# EAGLE board mubi-ESP32-38 (EAGLE 7.2.0)
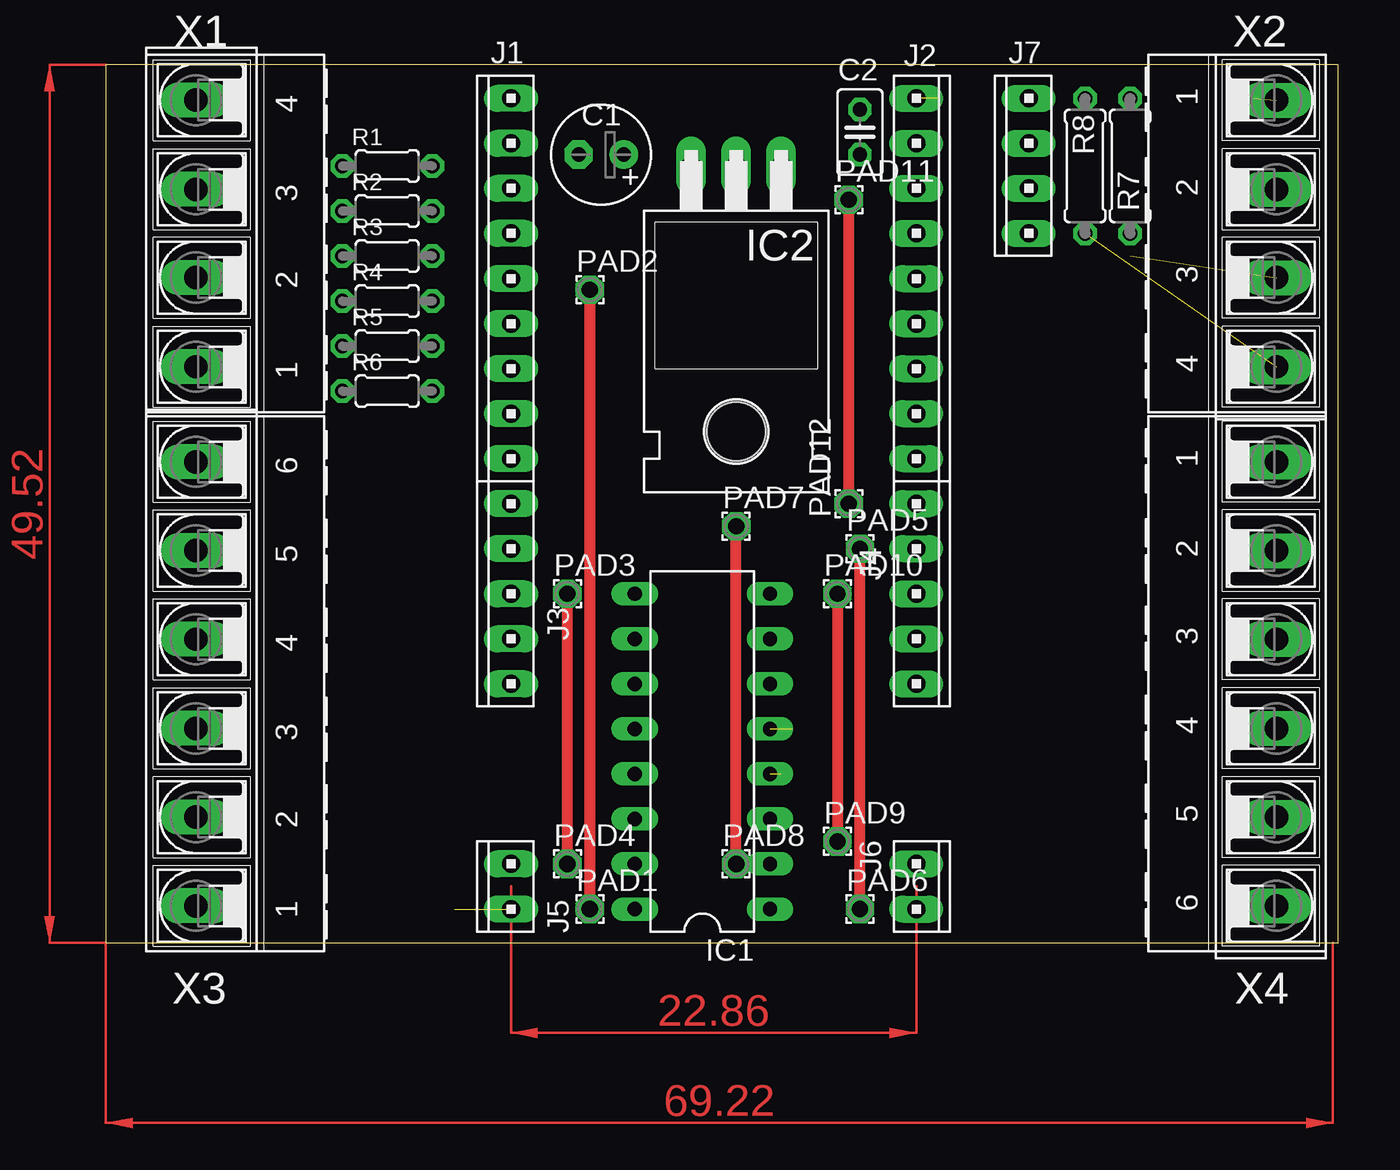
[diagram p0: board, top side]
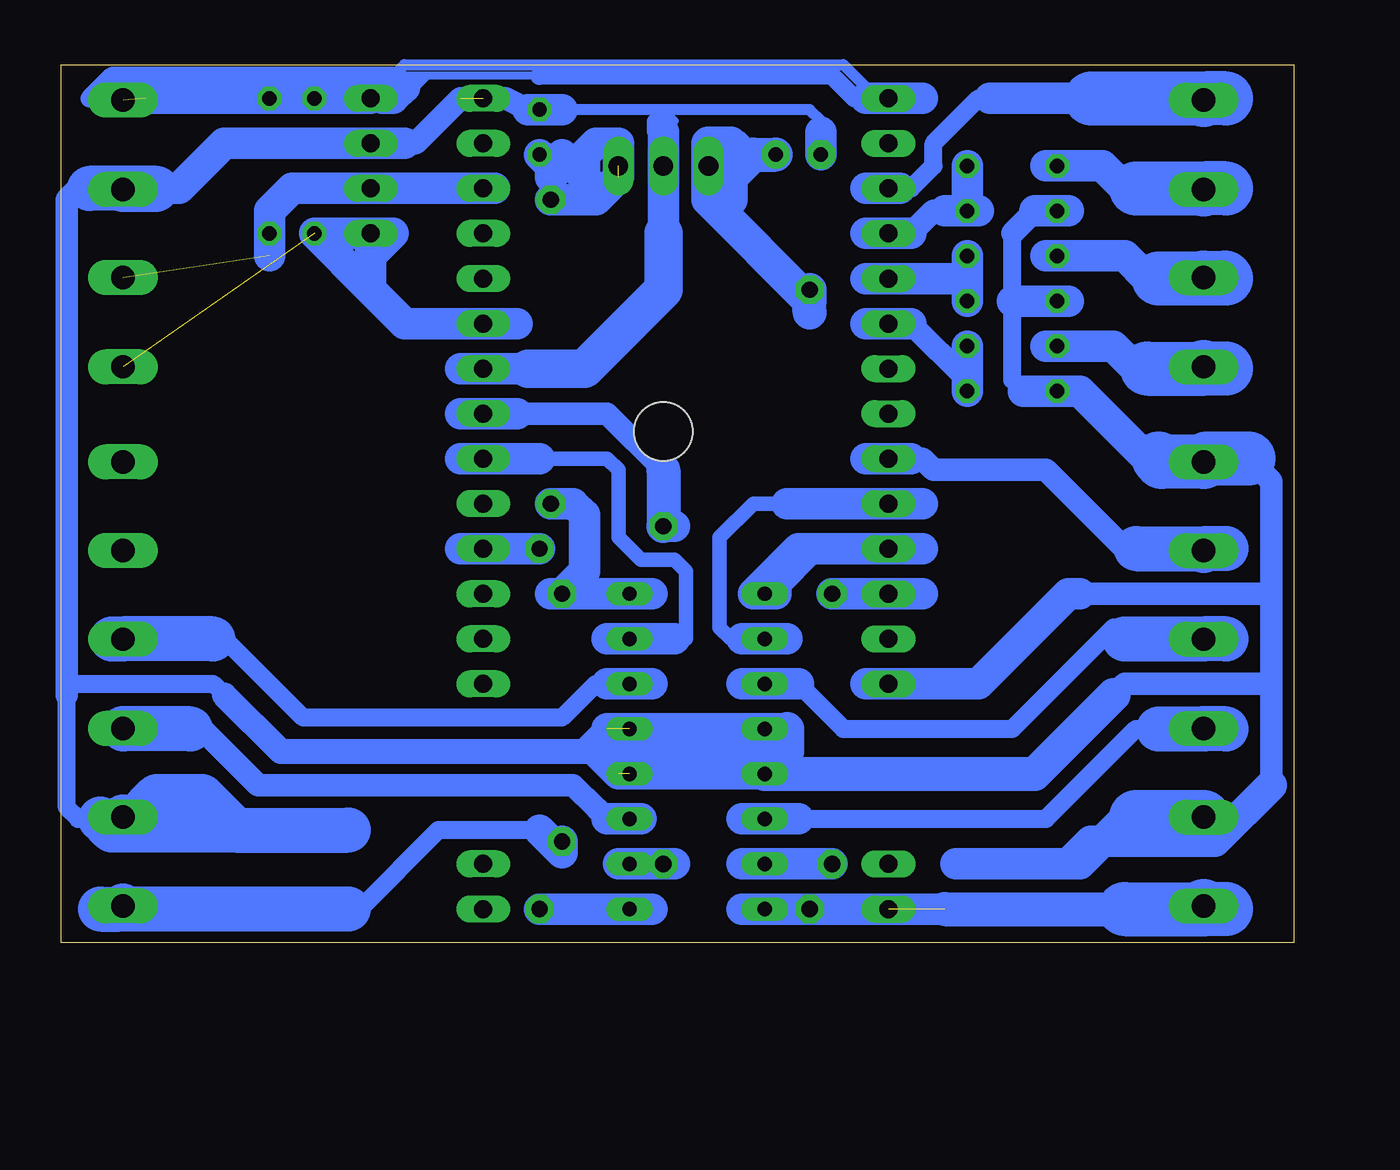
[diagram p1: board, bottom side, seen from below]

Size 69.52 x 49.52 mm. Coordinates in mm from the lower left corner, seen from the top.
Outline: 0,0 69.52,0 69.52,49.52 0,49.52 0,0
Copper layers (1*16): Top 0.035mm / dielectric 1.5mm / Bottom 0.035mm
Design rules "default": minimum track width 10mil, minimum drill 24mil, track to track 8mil, track to pad 8mil, pad to pad 8mil, via to via 8mil, smd to smd 8mil, copper to edge 40mil, drill to drill 8mil, minimum pad ring 10mil, minimum via ring 8mil, stop-mask expansion 4mil, vias tented up to drill 0mil, thermal gap 10mil

## Footprints (pad centres in the part's own frame; a part is rotated, then mirrored left to right if it is on the bottom)
E2,5-6 = drill 0.813 pad 1.6: + -1.27,0 | drill 0.813 pad 1.6 octagon: - 1.27,0
C025-025X050 = drill 0.813 octagon: 1 -1.27,0; 2 1.27,0
DIL16 = drill 0.813 long: 1 -8.89,-3.81; 2 -6.35,-3.81; 3 -3.81,-3.81; 4 -1.27,-3.81; 5 1.27,-3.81; 6 3.81,-3.81; 7 6.35,-3.81; 8 8.89,-3.81; 9 8.89,3.81; 10 6.35,3.81; 11 3.81,3.81; 12 1.27,3.81; 13 -1.27,3.81; 14 -3.81,3.81; 15 -6.35,3.81; 16 -8.89,3.81
TO220H = drill 1.118 long: 1 -2.54,-10.16; 2 0,-10.16; 3 2.54,-10.16 | hole 3.302: 0,4.826
10X09MTA = drill 1.016 long: 1 10.16,0; 2 7.62,0; 3 5.08,0; 4 2.54,0; 5 0,0; 6 -2.54,0; 7 -5.08,0; 8 -7.62,0; 9 -10.16,0
10X05MTA = drill 1.016 long: 1 5.08,0; 2 2.54,0; 3 0,0; 4 -2.54,0; 5 -5.08,0
10X02MTA = drill 1.016 long: 1 1.27,0; 2 -1.27,0
10X04MTA = drill 1.016 long: 1 3.81,0; 2 1.27,0; 3 -1.27,0; 4 -3.81,0
1,6/0,9 = drill 0.914 pad 1.6 octagon: 1 0,0
0204/5 = drill 0.813 octagon: 1 -2.54,0; 2 2.54,0
0207/7 = drill 0.813 octagon: 1 -3.81,0; 2 3.81,0
AK500/4-H = drill 1.321 long: 1 -7.518,0; 2 -2.489,0; 3 2.489,0; 4 7.518,0
AK500/6-H = drill 1.321 long: 1 -12.522,0; 2 -7.518,0; 3 -2.515,0; 4 2.515,0; 5 7.518,0; 6 12.522,0

## Placement (x,y rotation side)
C1  [E2,5-6]  27.94,44.45 180 top
C2  [C025-025X050]  42.55,45.72 90 top
IC1  L293D  [DIL16]  33.66,10.8 90 top
IC2  7805T  [TO220H]  35.56,33.66 180 top
J1  [10X09MTA]  22.86,37.47 90 top
J2  [10X09MTA]  45.72,37.47 270 top
J3  [10X05MTA]  22.86,19.69 90 top
J4  [10X05MTA]  45.72,19.69 270 top
J5  [10X02MTA]  22.86,3.17 90 top
J6  [10X02MTA]  45.72,3.17 270 top
J7  [10X04MTA]  52.07,43.81 90 top
PAD1  WIREPAD1,6/0,9  [1,6/0,9]  27.3,1.91 0 top
PAD2  WIREPAD1,6/0,9  [1,6/0,9]  27.3,36.83 0 top
PAD3  WIREPAD1,6/0,9  [1,6/0,9]  26.04,19.69 0 top
PAD4  WIREPAD1,6/0,9  [1,6/0,9]  26.04,4.44 0 top
PAD5  WIREPAD1,6/0,9  [1,6/0,9]  42.55,22.23 0 top
PAD6  WIREPAD1,6/0,9  [1,6/0,9]  42.55,1.91 0 top
PAD7  WIREPAD1,6/0,9  [1,6/0,9]  35.56,23.5 0 top
PAD8  WIREPAD1,6/0,9  [1,6/0,9]  35.56,4.44 0 top
PAD9  WIREPAD1,6/0,9  [1,6/0,9]  41.27,5.71 0 top
PAD10  WIREPAD1,6/0,9  [1,6/0,9]  41.27,19.69 0 top
PAD11  WIREPAD1,6/0,9  [1,6/0,9]  41.91,41.91 0 top
PAD12  WIREPAD1,6/0,9  [1,6/0,9]  41.91,24.77 90 top
R1  [0204/5]  15.88,43.81 0 top
R2  [0204/5]  15.88,41.27 0 top
R3  [0204/5]  15.88,38.73 0 top
R4  [0204/5]  15.88,36.2 0 top
R5  [0204/5]  15.88,33.66 0 top
R6  [0204/5]  15.88,31.12 0 top
R7  [0207/7]  57.78,43.81 90 top
R8  [0207/7]  55.24,43.81 90 top
X1  [AK500/4-H]  5.08,40.01 90 top
X2  [AK500/4-H]  66.04,40.01 270 top
X3  [AK500/6-H]  5.08,14.61 90 top
X4  [AK500/6-H]  66.04,14.61 270 top

## Library data of the parts
C1 R1-R8 = resistor
C2 = rcl
IC1 = st-microelectronics; MPN: L293D; OC_FARNELL: 9589619; OC_NEWARK: 56P8249
IC2 = linear
J1-J7 = con-amp
PAD1-PAD12 = wirepad
X1 X2 = con-ptr500; OC_FARNELL: unknown; OC_NEWARK: unknown
X3 X4 = con-ptr500

## Nets
+3.3V: J1.1 J7.1 R7.2 R8.2 X2.1
+5V: C1.+ IC1.16 IC2.3 J5.2 PAD1.1 PAD2.1 X3.1
+VBAT: C2.1 IC1.8 IC2.1 PAD9.1 PAD10.1 PAD11.1 PAD12.1 X4.6
AUX2: J1.9 X3.5
CM11: IC1.2 J2.2 PAD7.1 PAD8.1
CM12: IC1.7 J2.1
CM21: IC1.15 J3.3 PAD3.1 PAD4.1
CM22: IC1.10 J3.1
ENAM1: IC1.1 J4.4 PAD5.1 PAD6.1
ENAM2: IC1.9 J3.2
GND: C1.- C2.2 IC1.4 IC1.5 IC1.12 IC1.13 IC2.2 J2.3 J2.9 J3.5 J7.2 R2.1 R4.1 R6.1 X2.2 X3.2 X3.6 X4.5
M11: IC1.3 X4.4
M12: IC1.6 X4.3
M21: IC1.14 X3.3
M22: IC1.11 X3.4
N$1: R1.1 X1.3
N$2: R3.1 X1.2
N$3: R5.1 X1.1
N$4: J1.3 X1.4
SCL: J2.7 J7.3 R7.1 X2.3
SDA: J2.4 J7.4 R8.1 X2.4
USON1: J1.4 R1.2 R2.2
USON2: J1.5 R3.2 R4.2
USON3: J1.6 R5.2 R6.2

## Tracks (layer width: path | path; a pad name or v marks a point on that pad's centre or on a via)
+3.3V  (1 unrouted)
  Bottom 0.457: 42.55,48.9 48.9,48.9 | 48.9,48.9 50.8,48.9 | 50.16,48.26 49.53,48.26 48.9,48.9
  Bottom 0.61: J7.1 50.16,49.53 25.4,49.53 23.5,47.62
  Bottom 1.016: 24.13,47.62 24.77,47.62 26.04,48.9 42.55,48.9 | 50.8,48.9 66.67,48.9 67.94,47.62 J7.1 51.44,47.62
  Bottom 1.778: J7.1 R8.2 R7.2 64.77,47.62 | 20.95,47.62 J1.1 23.5,47.62 24.13,47.62 | 51.44,47.62 50.8,47.62 50.16,48.26
+5V  (1 unrouted)
  Top 0.61: PAD1.1 PAD2.1
  Bottom 1.778: 31.11,1.91 IC1.16 PAD1.1 19.68,1.91
  Bottom 1.93: 19.68,1.91 9.53,1.91 | PAD2.1 27.3,36.2 | 27.3,35.56 27.3,36.2 | 27.3,36.2 33.02,41.91 IC2.3 | IC2.3 33.02,45.09 31.75,45.09 31.11,44.45 30.48,44.45 | 30.48,44.45 C1.+ | IC2.3 33.02,43.18 31.75,41.91 31.75,43.18 30.48,44.45
  Bottom 3.048: 9.53,1.91 4.9,1.91 | 3.81,1.91 4.9,1.91 | 4.9,1.91 X3.1
+VBAT  (1 unrouted)
  Top 0.61: PAD10.1 PAD9.1 | PAD12.1 PAD11.1
  Bottom 1.016: 42.55,6.35 48.26,6.35 52.7,1.91 53.34,1.91
  Bottom 1.778: PAD9.1 41.27,5.08 42.55,6.35 | 36.2,19.69 IC1.8 PAD10.1 | PAD10.1 41.91,19.69 | PAD12.1 40.64,24.77 40.01,24.13 40.01,20.96 PAD10.1 | PAD11.1 39.37,41.91 38.1,43.18 38.1,45.09 39.37,45.09 40.01,44.45 40.01,43.18 | 40.01,43.18 39.37,42.55 | 40.01,43.18 41.27,44.45 41.27,43.81 41.91,43.18 41.91,43.81 C2.1
  Bottom 2.54: 53.34,1.91 66.22,1.91 | 67.31,1.91 66.22,1.91 | 66.22,1.91 X4.6
AUX2
  Bottom 1.27: 21.59,27.3 20.95,27.3 20.32,26.67 13.97,26.67 9.53,22.23 8.89,22.23
  Bottom 1.778: 24.13,27.3 J1.9 21.59,27.3
  Bottom 2.54: 8.89,22.23 4.98,22.23 | 3.81,22.23 4.98,22.23 | 4.98,22.23 X3.5
CM11
  Top 0.61: PAD8.1 PAD7.1
  Bottom 1.27: 43.81,29.84 38.73,29.84 35.56,26.67
  Bottom 1.778: 46.99,29.84 J2.2 43.81,29.84 | 34.92,23.5 PAD7.1 | 38.1,4.44 IC1.2 PAD8.1 34.92,4.44
  Bottom 1.93: 35.56,26.67 PAD7.1
CM12
  Bottom 0.813: 34.92,17.14 34.29,17.14 34.29,20.96 34.92,21.59 36.83,21.59 38.1,22.86 38.1,26.67 38.73,27.3 42.55,27.3
  Bottom 1.778: 38.73,17.14 IC1.7 34.92,17.14 | 46.99,27.3 J2.1 42.55,27.3
CM21
  Top 0.61: PAD4.1 PAD3.1
  Bottom 1.778: 31.11,4.44 IC1.15 PAD4.1 | 20.95,19.69 J3.3 PAD3.1
CM22
  Bottom 0.813: 31.11,17.14 31.75,17.14 32.38,17.78 32.38,22.86 30.48,24.77 28.57,24.77
  Bottom 1.778: 28.57,17.14 IC1.10 31.11,17.14 | 28.57,24.77 J3.1 20.95,24.77
ENAM1
  Top 0.61: PAD6.1 PAD5.1
  Bottom 1.778: PAD5.1 J4.4 46.99,22.23 | PAD6.1 IC1.1 36.2,1.91
ENAM2
  Bottom 1.778: 20.95,22.23 J3.2 27.3,22.23 | 27.3,22.23 27.94,22.23 30.48,19.69 IC1.9 | IC1.9 29.21,19.69 29.21,20.32 | 29.21,20.32 27.3,22.23 | 29.21,20.32 IC1.9
GND  (3 unrouted)
  Bottom 0.457: 35.56,45.72 34.92,46.36 35.56,46.99
  Bottom 0.61: 35.56,46.99 41.27,46.99 | 26.67,45.72 26.67,46.36 27.3,46.99 35.56,46.99 | 35.56,46.99 36.2,46.36 36.2,45.72 35.56,45.72
  Bottom 1.016: 67.31,6.99 68.58,6.99 69.22,7.62 69.22,14.61 60.96,14.61 60.33,13.97 | 15.24,31.12 15.88,31.75 15.88,36.2 15.88,40.01
  Bottom 1.27: 43.18,46.99 44.45,47.62 46.99,47.62 49.53,45.09 50.16,45.09 | 15.88,40.01 14.61,41.27 | 1.27,8.89 1.27,14.61 | 1.27,14.61 1.27,19.69 | 1.27,19.69 1.27,26.04 2.54,27.3 | 12.06,19.69 1.27,19.69 | 10.16,13.97 9.53,14.61 1.27,14.61 | 67.94,42.55 68.58,42.55 69.22,41.91 69.22,14.61 69.22,13.97
  Bottom 1.422: 60.33,13.97 57.15,10.8 40.01,10.8 38.73,12.07
  Bottom 1.778: 38.73,12.07 IC1.12 | IC1.12 28.57,12.07 28.57,9.53 IC1.13 38.1,9.53 39.37,10.8 29.21,10.8 29.21,11.43 IC1.12 | IC2.2 35.56,42.55 | IC2.2 35.56,45.72 | 41.27,46.99 C2.2 43.18,46.99 | 50.16,45.09 J7.2 60.33,45.09 62.87,42.55 64.14,42.55 | C1.- 26.67,45.72 | 15.24,31.12 R6.1 12.06,31.12 8.26,27.3 7.62,27.3 | 14.61,41.27 R2.1 12.7,41.27 | 12.7,36.2 R4.1 15.88,36.2 | 46.99,32.38 J2.3 43.18,32.38 | 35.56,40.01 IC2.2 | 8.89,6.99 9.53,6.99 12.06,4.44 12.7,4.44 | 19.05,4.44 12.7,4.44 | 12.7,4.44 11.43,5.71 4.45,5.71 1.27,8.89 | 24.13,14.61 J3.5 17.78,14.61 12.7,19.69 12.06,19.69
  Bottom 1.93: 28.57,12.07 28.57,10.8 IC1.13 14.61,9.53 10.16,13.97
  Bottom 2.184: 43.18,32.38 40.01,32.38 35.56,36.83 35.56,40.01
  Bottom 2.54: X4.5 65.3,7.09 64.14,8.25 61.59,8.25 59.69,6.35 | 59.69,6.35 53.34,6.35 | 59.69,6.35 66.67,6.35 67.31,6.99 | X2.2 64.19,42.49 64.14,42.55 67.94,42.55
  Bottom 3.048: X3.2 8.89,7.09 8.89,6.99 | 2.54,27.3 4.9,27.3 X3.6 7.44,27.13 7.62,27.3
M11
  Bottom 1.27: 38.73,6.99 39.37,7.62 40.64,8.89 58.42,8.89 61.59,12.07 62.23,12.07
  Bottom 1.778: 36.83,6.99 IC1.3 38.73,6.99
  Bottom 2.54: 62.23,12.07 66.02,12.07 X4.4
M12
  Bottom 1.016: 38.73,14.61 39.37,14.61 41.27,12.7 55.88,12.7 60.33,17.14 60.96,17.14
  Bottom 1.778: 36.2,14.61 IC1.6 38.73,14.61
  Bottom 2.54: 60.96,17.14 66.06,17.14 | 66.67,17.14 66.06,17.14 | 66.06,17.14 X4.3
M21
  Bottom 1.016: 27.94,6.99 13.97,6.99 8.89,12.07 7.62,12.07
  Bottom 1.778: 31.11,6.99 IC1.14 27.94,6.99
  Bottom 2.54: 7.62,12.07 5.05,12.07 | 3.81,12.07 5.05,12.07 | 5.05,12.07 X3.3
M22
  Bottom 1.016: 27.94,14.61 25.4,12.07 15.88,12.07 10.16,17.78 10.16,17.14 9.53,17.14
  Bottom 1.778: 31.11,14.61 IC1.11 27.94,14.61
  Bottom 2.54: 9.53,17.14 5.71,17.14 5.11,17.14 | 3.81,17.14 5.11,17.14 | 5.11,17.14 X3.4
N$1
  Bottom 1.778: 13.97,43.81 R1.1 10.79,43.81 9.53,42.55 8.89,42.55
  Bottom 3.048: 8.89,42.55 5.03,42.55 | 3.81,42.55 5.03,42.55 | 5.03,42.55 X1.3
N$2
  Bottom 1.778: 7.62,37.47 8.26,37.47 9.53,38.73 R3.1 13.97,38.73
  Bottom 3.048: X1.2 3.86,37.52 3.81,37.47 7.62,37.47
N$3
  Bottom 1.778: 13.97,33.66 R5.1 10.16,33.66 8.89,32.38 8.26,32.38
  Bottom 3.048: 8.26,32.38 4.98,32.38 | 3.81,32.38 4.98,32.38 | 4.98,32.38 X1.1
N$4
  Bottom 1.016: 22.23,42.55 21.59,42.55 20.32,43.81 20.32,45.09 17.78,47.62 17.14,47.62
  Bottom 1.778: 24.13,42.55 J1.3 22.23,42.55 | 17.14,47.62 11.43,47.62
  Bottom 3.048: 11.43,47.62 4.98,47.62 | 3.81,47.62 4.98,47.62 | 4.98,47.62 X1.4
SCL  (1 unrouted)
  Bottom 1.778: 45.09,42.55 J2.7 J7.3 55.88,42.55 56.52,42.55 57.78,41.27 R7.1 57.78,38.73
SDA  (1 unrouted)
  Bottom 1.778: 43.81,34.92 J2.4 50.16,34.92 52.07,36.83 | 52.07,36.83 R8.1 J7.4 | J7.4 50.8,40.01 52.07,38.73 | 52.07,38.73 52.07,36.83 | 52.07,38.73 J7.4
USON1
  Bottom 1.27: 21.59,40.01 20.32,41.27 19.68,41.27
  Bottom 1.778: 24.13,40.01 J1.4 21.59,40.01 | 19.68,41.27 R2.2 | 17.78,41.27 R2.2 | R1.2 R2.2
USON2
  Bottom 1.778: 24.13,37.47 J1.5 18.41,37.47 | 18.41,37.47 R3.2 | R4.2 18.41,37.47
USON3
  Bottom 1.27: 21.59,34.92 18.41,31.75
  Bottom 1.778: 24.13,34.92 J1.6 21.59,34.92 | R6.2 18.41,31.75 R5.2
(copper drawn outside any net)
  shapes: Top area x3